# Altium PCB PCB1.PcbDoc
Units mil, origin at the board's own origin, x right, y up, seen from the top; angles counter-clockwise.
Board outline 6000 x 4000 mil, 2 copper layers (Top Layer, Bottom Layer); 11 components, 9 nets, 68 pads, 0 vias.
Unrouted connection lines stored in the file: 4.
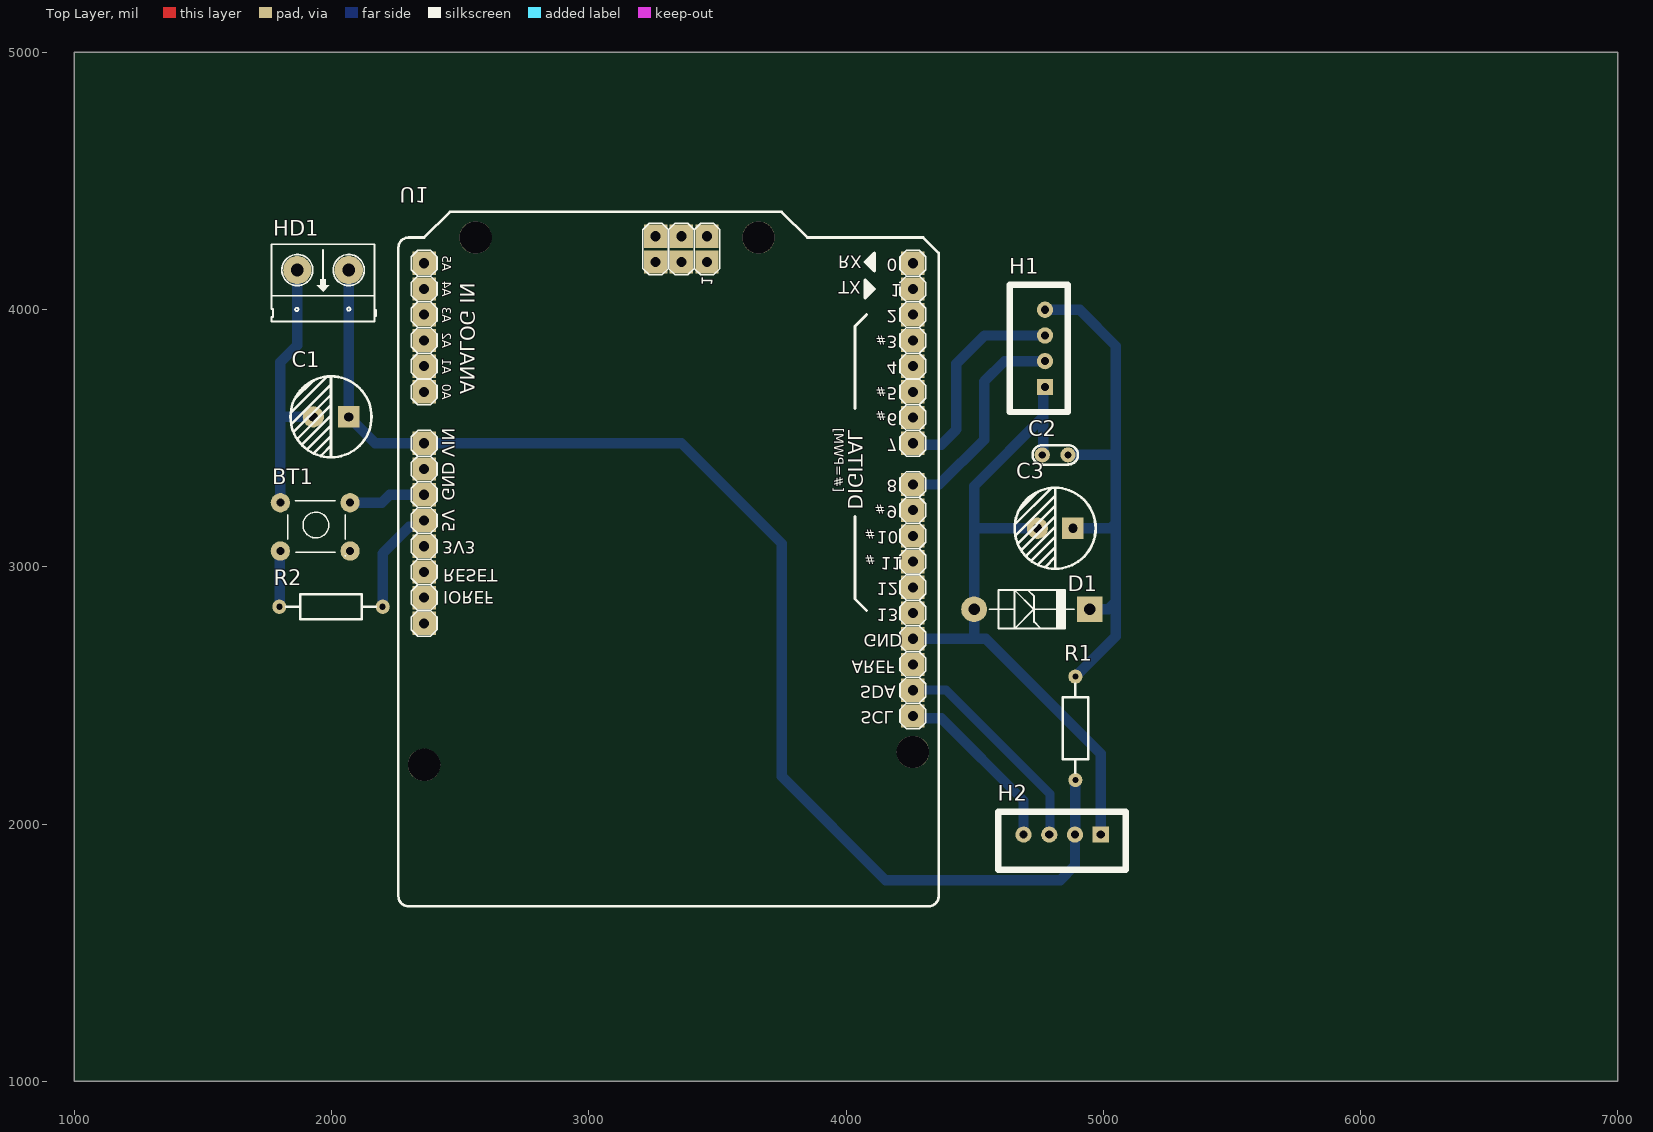
[diagram p0: Top Layer view]
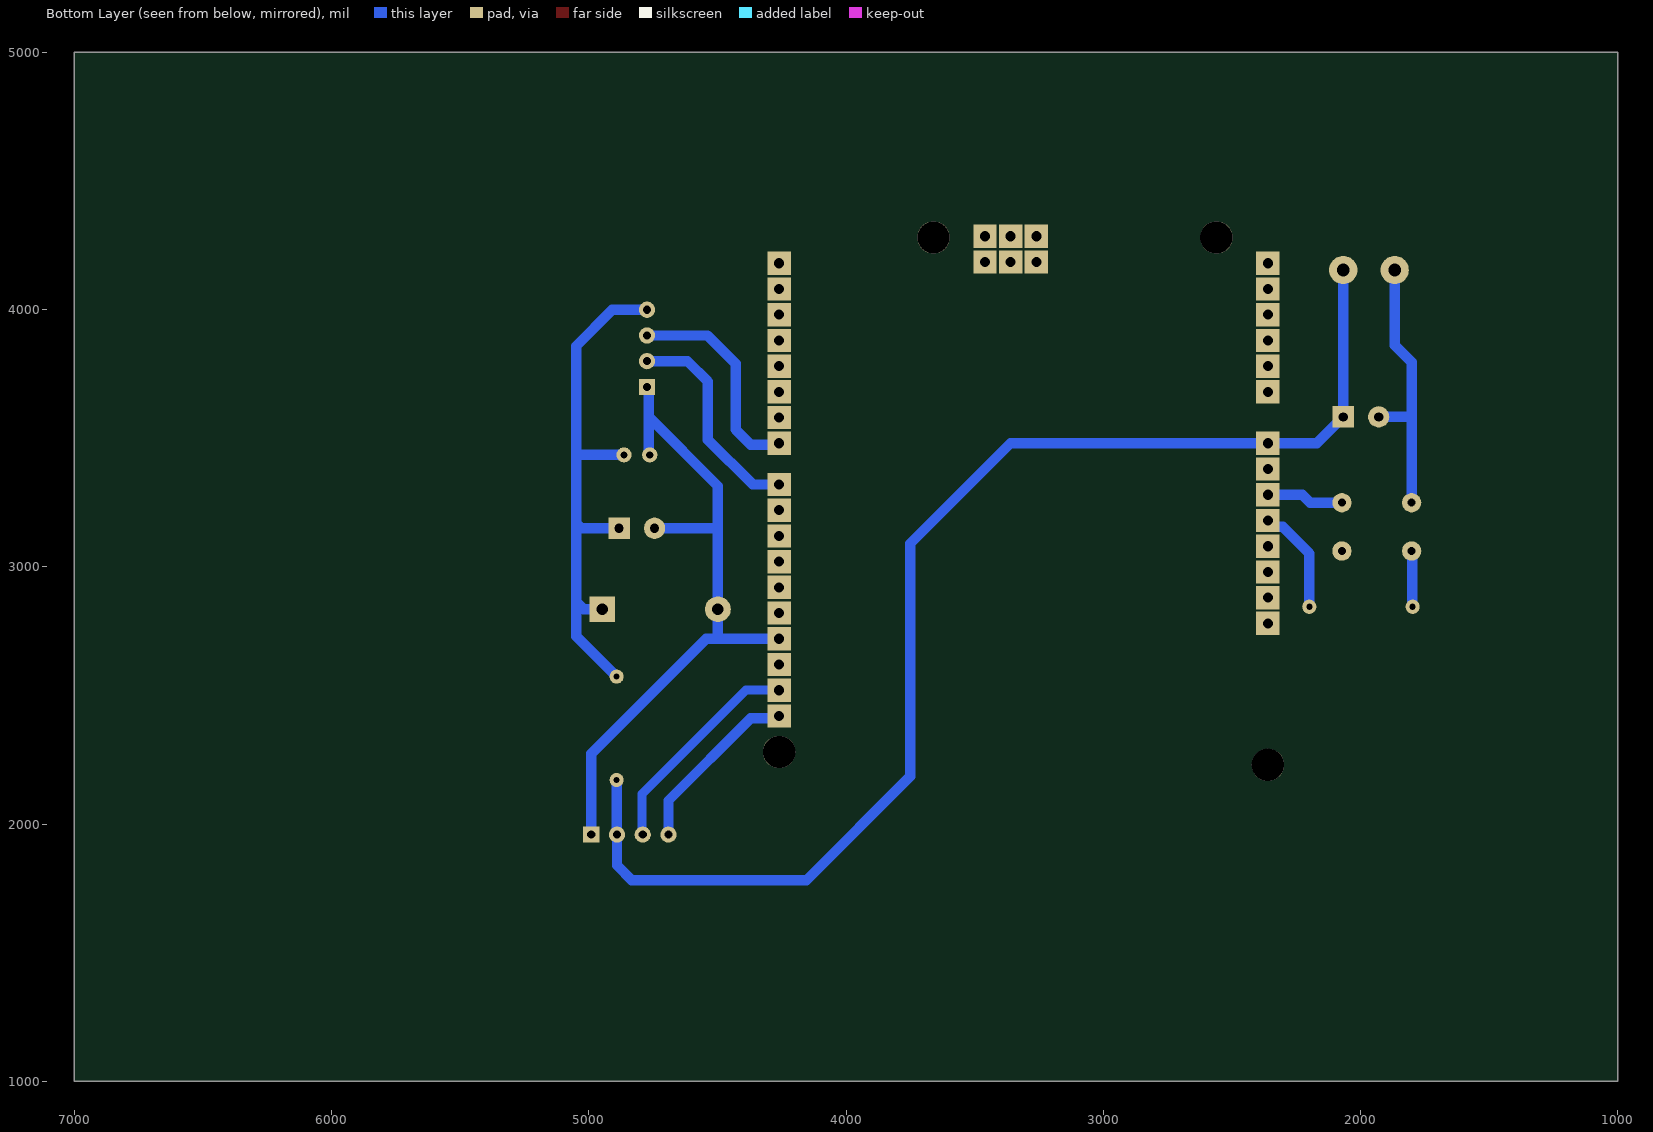
[diagram p1: Bottom Layer view, seen from below]
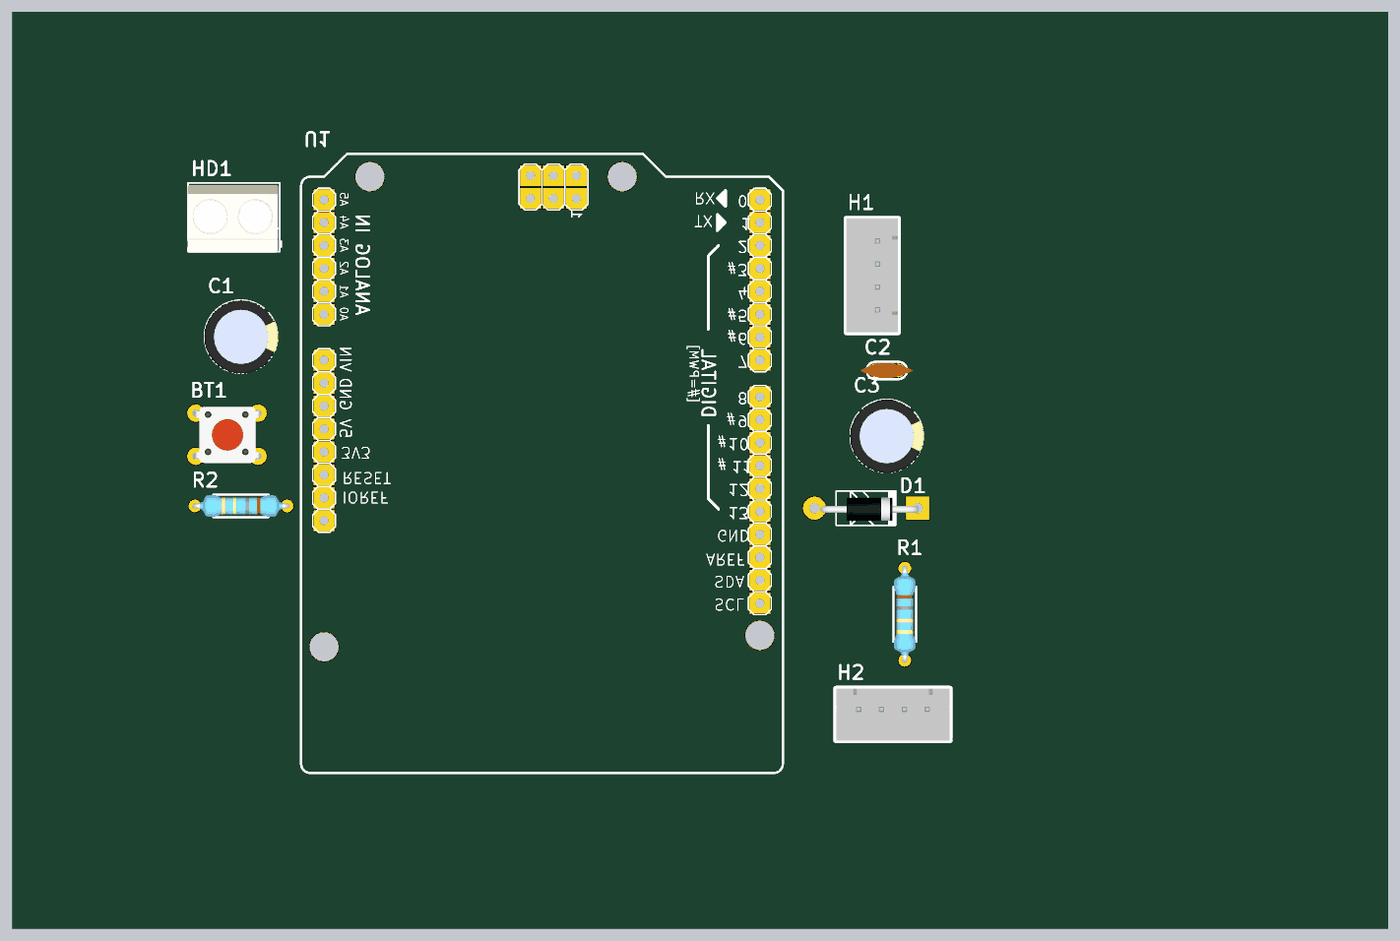
[diagram p2: 3D render of the assembled board from above, using the file's embedded part models]

## Layer stack, top to bottom
Top Solder: solder mask 0.4, Solder Resist, Dk 3.5
Top Layer: signal copper 1.4
Dielectric 1: dielectric 12.6, FR-4, Dk 4.8
Bottom Layer: signal copper 1.4
Bottom Solder: solder mask 0.4, Solder Resist, Dk 3.5

## Board outline
1000,1000 7000,1000 7000,5000 1000,5000

## Design rules (kind name [scope] priority, off if disabled: settings)
Clearance [All] p1: gap=10 ignorepadtopadclearanceinfootprint=FALSE except(0: Arc-Hole Track-Hole SMDPad-Hole THPad-Hole Via-Hole Fill-Hole Poly-Hole Region-Hole Text-Hole)
PolygonConnect [All] p1: connectstyle=Relief reliefconductorwidth=10 reliefentries=4 polygonreliefangle="90 Angle" airgapwidth=10
RoutingVias [All] p1: holewidth=28 width=50 viastyle="Through Hole" minholewidth=28 minwidth=50 maxholewidth=28 maxwidth=50
SolderMaskExpansion [All] p1: expansion=4
Width GND [InNet('GND')] p1: maxlimit=50 minlimit=40 preferedwidth=45
Width VCC [InNet('+5')] p2: maxlimit=50 minlimit=40 preferedwidth=45
Width net [All] p3: maxlimit=45 minlimit=35 preferedwidth=40
Width [All] p4: maxlimit=10 minlimit=10 preferedwidth=10
30 further rules are at their usual default settings.

## Components (designator, comment, footprint, x,y, rotation, side; value= is the part's Value field where it differs from the comment)
BT1 "Nut Nhan 4 Chan Cam 6x6" "Nut Nhan 4 Chan Cam 6x6" 1814.18,3257.02 r0 top
C1 "4.7uF" "tu hoa 8mm" 1998.03,3582.68 r180 top
C2 "103" "tu gom" 4812.99,3435.04 r180 top
C3 "4.7uF" "tu hoa 8mm" 4812.99,3149.61 r180 top
D1 "3v3" DZ2A 4948.03,2834.65 r180 top
H1 "CC2530" XH2.54M-4 4773.62,3699.21 r90 top
H2 "LCD_i2c" XH2.54M-4 4990.16,1958.66 r180 top
HD1 "Header 2" HED2 2066.93,4153.54 r180 top
R1 "47" "tro vach 1/4w" 4891.73,2372.05 r90 top
R2 "1k" "tro vach 1/4w" 1998.03,2844.49 r0 top
U1 "Arduino Uno" "Arduino Uno" 3304.88,3099.68 r90 top

## Footprints (in the part's own frame and the unit in brackets; to place one, negate y for a bottom-side part, rotate by r counter-clockwise, add the part's x,y. Pads: shape width x height; smd on the part's side, far side on the other; paste and mask are expansions set on the pad)
"Arduino Uno" [mm]
  rect 2.3x2.3 hole 1: 0(27.44,-24.26) 1(24.9,-24.26) 2(22.36,-24.26) 3(19.82,-24.26) 3V3(-0.5,24) 4(17.28,-24.26) 5(14.74,-24.26) 5V(2.04,24) 6(12.2,-24.26) 7(9.66,-24.26) 8(5.596,-24.26) 9(3.056,-24.26) 10(0.516,-24.26) 11(-2.024,-24.26) 12(-4.564,-24.26) 13(-7.104,-24.26) A0(14.74,24) A1(17.28,24) A2(19.82,24) A3(22.36,24) A4(24.9,24) A5(27.44,24) AREF(-12.184,-24.26) GND1(4.58,24) GND2(7.12,24) GND3(-9.644,-24.26) ICSP1(27.567,-3.94) ICSP2(30.107,-3.94) ICSP3(27.567,-1.4) ICSP4(30.107,-1.4) ICSP5(27.567,1.14) ICSP6(30.107,1.14) IOREF(-5.58,24) NC(-8.12,24) RESET(-3.04,24) SCL(-17.264,-24.26) SDA(-14.724,-24.26) Vin(9.66,24)
  round 3.2 hole 3.2: H1(-20.82,-24.26) H2(-22.09,24) H3(29.98,18.92) H4(29.98,-9.02)
  Bottom Layer lines w0.305: -14.724,-24.26 -14.47,-24.26
  silkscreen extent -36.06,-26.8 32.52,26.54
DZ2A [mil] "Diode 2A, W 150mil, L 450mil"
  round 100 hole 45: 1(450,0)
  rect 100x100 hole 45: 2(0,0)
  silkscreen extent 61,-75 391,75, body extent -5,-46 425,55, height 100
HED2 [mil] "Header 2, 2 pin, hight 300mil, Pin to Pin 200, Colour Green"
  round 110 hole 50: 1(0,0) 2(200,0)
  silkscreen extent -106,-100 300,200, body extent -92,-90 302,205, height 394
"Nut Nhan 4 Chan Cam 6x6" [mil] "SW button 4pin, 250 x250 mil"
  round 75 hole 31: 1(-13,-8) 1(258,-8) 2(-13,-196) 2(258,-196)
  silkscreen extent 15,-215 240,0, body extent -31,-225 281,19, height 276
"tro vach 1/4w" [mm]
  round 1.4 hole 0.6: 1(-5.1,0) 2(5.1,0)
  silkscreen extent -4.39,-1.25 4.42,1.25, body extent -5.38,-1.2 5.38,1.2, height 2.41
"tu gom" [mm] "Tu gom mini"
  round 1.5 hole 0.7: 1(-1.27,0) 2(1.27,0)
  silkscreen extent -2.25,-0.97 2.22,0.97, body extent -2.92,-0.85 2.92,0.85, height 6.12
"tu hoa 8mm" [mm]
  rect 2.1x2.1 hole 0.9: 1(-1.75,0)
  round 2.1 hole 0.9: 2(1.75,0)
  silkscreen extent -4,-4 4,4, body extent -4.1,-4.07 4.1,4.13, height 13.81
XH2.54M-4 [mm]
  rect 1.6x1.6 hole 0.8: 1(0,0)
  round 1.6 hole 0.8: 2(2.54,0) 3(5.08,0) 4(7.62,0)
  silkscreen extent -2.48,-2.26 10.1,3.46, body extent -2.48,-2.26 10.1,3.48, height 6.91

## Part data
BT1: "Nut Nhan 4 Chan 6x6mm", Ma_Hang=MH004584, Ten="Nút Nh?n 4 Chân 6x6x5MM DIP"
C1 C3: library part "Tu Hoa 4.7uF 400V 8x12", "C?m", Chung_Loai=C?m, Don_Vi=Con, Ma_Hang=MH003744, So_Chan=2, Ten_Linh_Kien="T? Hóa 4.7uF 400V 8x12MM"
C2: library part "Tu gom 103 50V", "C?m", Chung_Loai=C?m, Don_Vi=Con, Ma_Hang=MH000936, So_Chan=2, Ten_Linh_Kien="T? g?m 103 10nF 50V"
D1: library part DZ, "Diode Zenner"
H1 H2: library part "Header 4P 2.54 Duc Thang", "C?m", Chung_Loai=C?m, Don_Vi=Con, Ma_Hang=MH001285, Ten_Linh_Kien="Header 4P XH2.54-4P Ð?c Th?ng"
HD1: "Header 2 (Green)"
R1: library part "Tro Vach 1/4W 5% 330k", "C?m", Chung_Loai=C?m, Don_Vi=Con, Ma_Hang=MH007312, So_Chan=2, Ten_Linh_Kien="Tr? V?ch 1/4w 5% 330k"
R2: library part "Tro Vach 1/4W 5% 39R", "C?m", Chung_Loai=C?m, Don_Vi=Con, Ma_Hang=MH007315, So_Chan=2, Ten_Linh_Kien="Tr? V?ch 1/4w 5% 39R"

## Nets (pads, with @x,y where several pads share a name; then routed paths per layer and width w, separated by ;. In a path a pad name is that pad's centre, name@x,y a point inside that pad or via, vN(x,y) a via of type N, cw(c..) or ccw(c..) an arc to the next point about the centre after c; other vN are vias at no path point)
3v3: C2.1 C3.1 D1.2 H1.4 R1.2 | length 2163.8
  Bottom Layer w40: H1.4 4908.27,3999.21 5049.21,3858.27 5049.21,3425.2 ; C2.1 5039.37,3435.04 5049.21,3425.2 ; C3.1 5029.53,3149.61 5049.21,3169.29 ; R1.2 5049.21,2730.31 5049.21,2864.17 ; D1.2 5019.69,2834.65 5049.21,2864.17 ; 5049.21,2864.17 5049.21,3169.29 ; 5049.21,3169.29 5049.21,3425.2
+5: C1.1 H2.2 HD1.1 R1.1 U1.Vin | length 5027.3
  Bottom Layer w40: HD1.1 C1.1 2169.61,3480 U1.Vin 3360.55,3480 3750,3090.55 3750,2185.04 4153.54,1781.5 4832.68,1781.5 4890.16,1838.98 H2.2 4890.94,1959.45 4890.94,2170.47 R1.1
GND: BT1.1 C1.2 C2.2 C3.2 D1.1 H1.1 H2.1 HD1.2 U1.GND1 U1.GND2 U1.GND3 | length 4078.9
  Bottom Layer w40: BT1.1@1801.18,3249.02 1801.18,3582.68 ; HD1.2 1866.93,3861.42 1801.18,3795.67 1801.18,3582.68 ; C1.2 1801.18,3582.68 ; BT1.1@2072.18,3249.02 2195.87,3249.02 2226.85,3280 U1.GND1 ; U1.GND3 4498.03,2720 ; C3.2 4498.03,3149.61 ; C2.2 4766.64,3438.69 4766.64,3582.68 ; H1.1 4766.64,3692.23 4766.64,3582.68 ; H2.1 4990.16,2273.62 4543.78,2720 4498.03,2720 ; 4498.03,2720 D1.1 4498.03,3149.61 ; 4498.03,3149.61 4498.03,3314.07 4766.64,3582.68
NetBT1_2: BT1.2 R2.1 | length 218.2
  Bottom Layer w40: R2.1 1799.21,2846.46 1799.21,3059.06 BT1.2@1801.18,3061.02
NetR2_2: R2.2 U1.5V | length 421.6
  Bottom Layer w40: R2.2 2198.82,3051.8 2302.3,3155.28 2335.28,3155.28 U1.5V
pRX_cc2530: H1.2 U1.8 | length 844.7
  Bottom Layer w40: U1.8 4363.31,3320 4537.4,3494.09 4537.4,3720.47 4616.14,3799.21 H1.2
SCL: H2.4 U1.SCL | length 699
  Bottom Layer w40: U1.SCL 4268.58,2411.42 4370.08,2411.42 4690.16,2091.34 H2.4
SDA: H2.3 U1.SDA | length 859.4
  Bottom Layer w35: U1.SDA 4389.45,2520 4793.31,2116.14 4793.31,1961.81 H2.3
TX_cc2530: H1.3 U1.7 | length 841.8
  Bottom Layer w40: U1.7 4265.59,3474.41 4370.08,3474.41 4429.13,3533.46 4429.13,3789.37 4538.98,3899.21 H1.3
pads on no net: U1.0 U1.1 U1.2 U1.3 U1.3V3 U1.4 U1.5 U1.6 U1.9 U1.10 U1.11 U1.12 U1.13 U1.A0 U1.A1 U1.A2 U1.A3 U1.A4 U1.A5 U1.AREF U1.H1 U1.H2 U1.H3 U1.H4 U1.ICSP1 U1.ICSP2 U1.ICSP3 U1.ICSP4 U1.ICSP5 U1.ICSP6 U1.IOREF U1.NC U1.RESET

## Text inside footprints (layer, text, board x,y; h text height)
U1: Top Overlay "SDA" at 4056.34,2537.82 h47.6 r180; Top Overlay "SCL" at 4056.85,2438.27 h47.6 r180; Top Overlay "#" at 4111.97,3241.42 h37.4 r180; Top Overlay "#" at 4115.91,3603.62 h37.4 r180; Top Overlay "#" at 4115.91,3898.9 h37.4 r180; Top Overlay "#" at 4115.91,3698.11 h37.4 r180; Top Overlay "#" at 4072.6,3142.99 h37.4 r180; Top Overlay "#" at 4072.6,3044.57 h37.4 r180; Top Overlay "[#=PWM]" at 3955,3290 h37.4 r270; Top Overlay "0" at 4158.28,4197.58 h47.6 r180; Top Overlay "1" at 4174.14,4097.58 h47.6 r180; Top Overlay "2" at 4158.28,3997.58 h47.6 r180; Top Overlay "3" at 4158.28,3897.58 h47.6 r180; Top Overlay "4" at 4158.28,3797.58 h47.6 r180; Top Overlay "5" at 4158.28,3697.58 h47.6 r180; Top Overlay "6" at 4158.28,3597.58 h47.6 r180; Top Overlay "7" at 4158.28,3497.58 h47.6 r180; Top Overlay "8" at 4158.28,3337.58 h47.6 r180; Top Overlay "9" at 4158.28,3237.58 h47.6 r180; Top Overlay "10" at 4118.62,3137.58 h47.6 r180; Top Overlay "11" at 4134.48,3037.58 h47.6 r180; Top Overlay "12" at 4118.62,2937.58 h47.6 r180; Top Overlay "13" at 4118.62,2837.58 h47.6 r180; Top Overlay "RX" at 3970,4210 h47.6 r180; Top Overlay "TX" at 3971,4110 h47.6 r180; Top Overlay "DIGITAL" at 4009,3222 h56.1 r270; Top Overlay "IOREF" at 2435,2905 h47.6 r180; Top Overlay "GND" at 2430,3256 h47.6 r270; Top Overlay "VIN" at 2430,3425 h47.6 r270; Top Overlay "A5" at 2431,4149 h34 r270; Top Overlay "A4" at 2431,4049 h34 r270; Top Overlay "A3" at 2431,3949 h34 r270; Top Overlay "A2" at 2431,3849 h34 r270; Top Overlay "A1" at 2431,3749 h34 r270; Top Overlay "3V3" at 2430,3100 h47.6 r180; Top Overlay "RESET" at 2435,2990 h47.6 r180; Top Overlay "GND" at 4068.11,2738.58 h47.6 r180; Top Overlay "1" at 3439,4092 h42.5 r270; Top Overlay "AREF" at 4021.52,2634.58 h47.6 r180; Top Overlay "ANALOG IN" at 2500,3670 h56.1 r270; Top Overlay "A0" at 2431,3649 h34 r270; Top Overlay "5V" at 2430,3135 h47.6 r270